# Altium PCB PCB1.PcbDoc
Units mil, origin at the board's own origin, x right, y up, seen from the top; angles counter-clockwise.
Board outline 4835 x 4005 mil, 2 copper layers (Top Layer, Bottom Layer); 7 components, 12 nets, 73 pads, 2 vias.
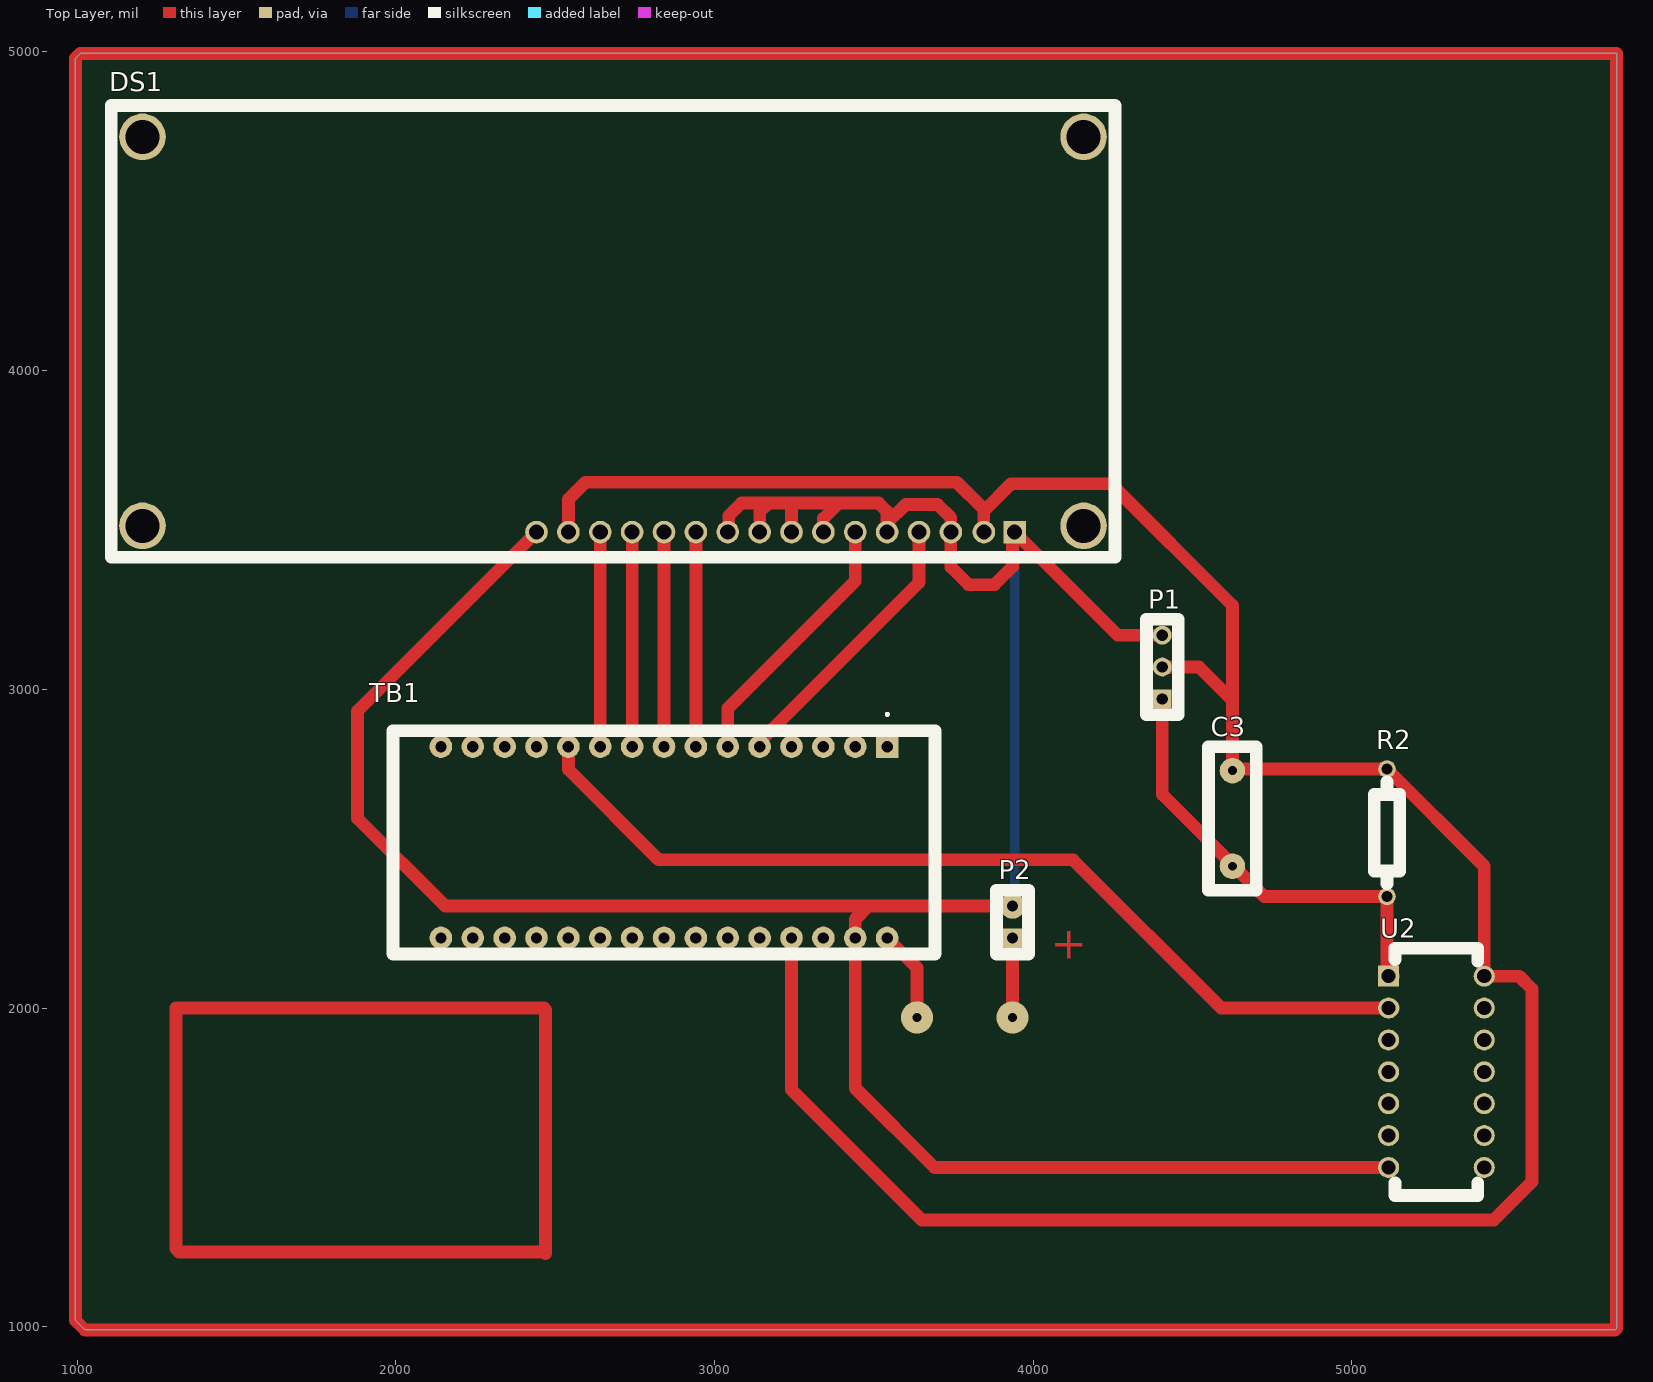
[diagram p0: Top Layer view]
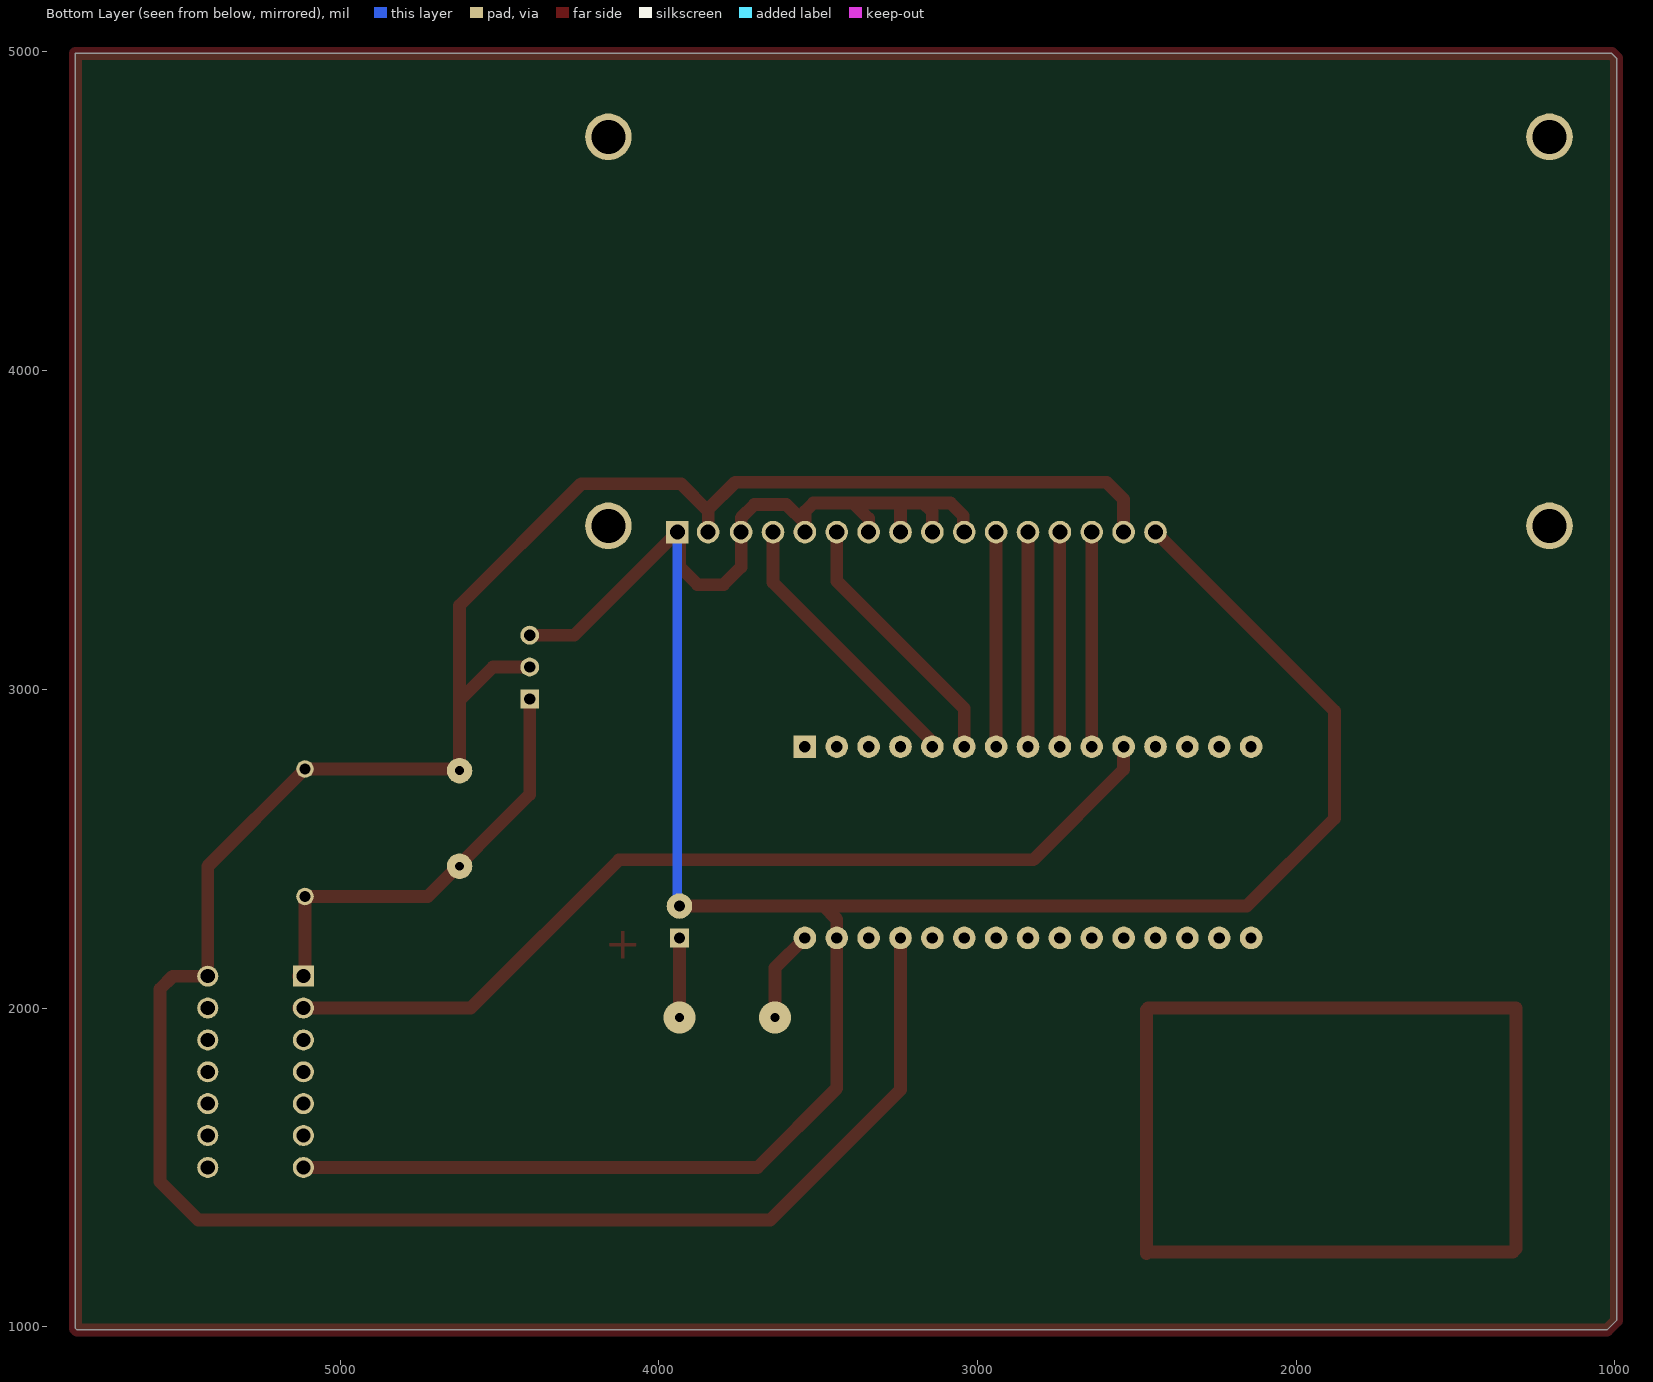
[diagram p1: Bottom Layer view, seen from below]

## Layer stack, top to bottom
Top Solder: solder mask 0.4, Solder Resist, Dk 3.5
Top Layer: signal copper 1.4
Dielectric 1: dielectric 12.6, FR-4, Dk 4.8
Bottom Layer: signal copper 1.4
Bottom Solder: solder mask 0.4, Solder Resist, Dk 3.5

## Board outline
995,1020 1025,990 5825,990 5830,995 5830,4995 1010,4995 995,4980

## Design rules (kind name [scope] priority, off if disabled: settings)
Clearance [All] p1: gap=10 ignorepadtopadclearanceinfootprint=FALSE except(0: Arc-Hole Track-Hole SMDPad-Hole THPad-Hole Via-Hole Fill-Hole Poly-Hole Region-Hole Text-Hole; 20: Arc-Arc Arc-Track Arc-SMDPad Arc-THPad Arc-Via Arc-Fill Arc-Poly Arc-Region Arc-Text Track-Track Track-SMDPad Track-THPad Track-Via Track-Fill Track-Poly Track-Region Track-Text)
PolygonConnect [All] p1: connectstyle=Relief reliefconductorwidth=10 reliefentries=4 polygonreliefangle="90 Angle" airgapwidth=10
RoutingVias [All] p1: holewidth=28 width=50 viastyle="Through Hole" minholewidth=28 minwidth=50 maxholewidth=28 maxwidth=50
SolderMaskExpansion [All] p1: expansion=4
Width [All] p1: maxlimit=40 minlimit=30 preferedwidth=40 toplayer_minwidth=40 bottomlayer_maxwidth=30 bottomlayer_prefwidth=30 minimp=50.000000 maximp=50.000000 favimp=50.000000
30 further rules are at their usual default settings.

## Components (designator, comment, footprint, x,y, rotation, side; value= is the part's Value field where it differs from the comment)
C3 "Cap" RAD-0.3 4625,2595 r90 top value=100pF
DS1 "LCM-S01602DTR/A" LCD_LCM-S01602DTR/A 2660,4135 r180 top
P1 "Header 3" HDR1X3 4405,2970 r90 top
P2 "Header 2" HDR1X2 3935,2220 r90 top
R2 "Res2" AXIAL-0.4 5110,2550 r90 top value=1K
TB1 "ARDUINO_NANO" *SHIELD_ARDUINO_NANO 2841.5,2520 r270 top
U2 "SN74AHC14N" DIP254P762X508-14 5415,1500 r0 top

## Footprints (in the part's own frame and the unit in brackets; to place one, negate y for a bottom-side part, rotate by r counter-clockwise, add the part's x,y. Pads: shape width x height; smd on the part's side, far side on the other; paste and mask are expansions set on the pad)
*SHIELD_ARDUINO_NANO [mm]
  rect 1.8x1.8 hole 0.9: 1(-7.62,17.78)
  round 1.8 hole 0.9: 2(-7.62,15.24) 3(-7.62,12.7) 4(-7.62,10.16) 5(-7.62,7.62) 6(-7.62,5.08) 7(-7.62,2.54) 8(-7.62,0) 9(-7.62,-2.54) 10(-7.62,-5.08) 11(-7.62,-7.62) 12(-7.62,-10.16) 13(-7.62,-12.7) 14(-7.62,-15.24) 15(-7.62,-17.78) 16(7.62,-17.78) 17(7.62,-15.24) 18(7.62,-12.7) 19(7.62,-10.16) 20(7.62,-7.62) 21(7.62,-5.08) 22(7.62,-2.54) 23(7.62,0) 24(7.62,2.54) 25(7.62,5.08) 26(7.62,7.62) 27(7.62,10.16) 28(7.62,12.7) 29(7.62,15.24) 30(7.62,17.78)
  silkscreen extent -10.3,-21.59 8.89,21.59
AXIAL-0.4 [mm] "Axial Device, Thru-Hole; 2 Leads; 0.4 in Pin Spacing"
  round 1.4 hole 0.85: 1(-5.08,0) 2(5.08,0)
  silkscreen extent -4.06,-1.02 4.06,1.02
DIP254P762X508-14 [mil]
  rect 66x66 hole 44: 1(-300,600)
  round 66 hole 44: 2(-300,500) 3(-300,400) 4(-300,300) 5(-300,200) 6(-300,100) 7(-300,0) 8(0,0) 9(0,100) 10(0,200) 11(0,300) 12(0,400) 13(0,500) 14(0,600)
  silkscreen extent -280,-88 -20,688
HDR1X2 [mm] "Connector; Header; 2 Position"
  rect 1.5x1.5 hole 0.9: 1(0,0)
  round 2.032 hole 0.9: 2(2.54,0)
  silkscreen extent -1.27,-1.27 3.81,1.27
HDR1X3 [mm] "Connector; Header; 3 Position"
  rect 1.5x1.5 hole 0.9: 1(0,0)
  round 1.5 hole 0.9: 2(2.54,0) 3(5.08,0)
  silkscreen extent -1.27,-1.27 6.35,1.27
LCD_LCM-S01602DTR/A [mm]
  rect 1.8x1.8 hole 1.2: 1(-32.55,16.3)
  round 1.8 hole 1.2: 2(-30.1,16.3) 3(-27.47,16.3) 4(-24.93,16.3) 5(-22.39,16.3) 6(-19.85,16.3) 7(-17.31,16.3) 8(-14.77,16.3) 9(-12.23,16.3) 10(-9.69,16.3) 11(-7.15,16.3) 12(-4.61,16.3) 13(-2.07,16.3) 14(0.47,16.3) 15(3.01,16.3) 16(5.55,16.3)
  round 3.716 hole 2.7: 17(-38.05,15.8) 18(-38.05,-15.2) 19(36.95,15.8) 20(36.95,-15.2)
  silkscreen extent -40.55,-17.7 39.45,18.3
RAD-0.3 [mil] "Radial Cap, Thru-Hole; 2 Leads; 0.3 in Pin Spacing"
  round 80 hole 27.56: 1(-150,0) 2(150,0)
  silkscreen extent -225,-75 225,75

## Part data
C3: "Capacitor", LatestRevisionDate=17-Jul-2002, LatestRevisionNote="Re-released for DXP Platform.", PackageDescription="Radial Cap, Thru-Hole; 2 Leads; 0.3 in Pin Spacing", PackageReference=RAD-0.3, Published=8-Jun-2000, Publisher="Altium Limited"
DS1: "Module, LCD; 16 x 2 mm; 5 x 8; 5 V _Typ._; 2 mA _Typ._; 4.2 V @50 degC _Min._", Package=None, Availability=Warning, MF=Lumex, MP=LCM-S01602DTR/A, Price="8.26 USD", SnapEDA_Link=https://www.snapeda.com/parts/LCM-S01602DTR/A/Lumex%2520Opto/Components%2520Inc/view-part/?ref=snap
P1: "Header, 3-Pin", LatestRevisionDate=17-Jul-2002, LatestRevisionNote="Re-released for DXP Platform.", Publisher="Altium Limited"
P2: "Header, 2-Pin", LatestRevisionDate=17-Jul-2002, LatestRevisionNote="Re-released for DXP Platform.", Publisher="Altium Limited"
R2: "Resistor", LatestRevisionDate=17-Jul-2002, LatestRevisionNote="Re-released for DXP Platform.", PackageDescription="Axial Device, Thru-Hole; 2 Leads; 0.4 in Pin Spacing", PackageReference=AXIAL-0.4, Published=8-Jun-2000, Publisher="Altium Limited"
TB1: "Dev.kit: Arduino; UART; ICSP, USB B mini, pin strips", Package=None, Availability=Unavailable, MF=Arduino, MP="ARDUINO NANO", Price=None, SnapEDA_Link=https://www.snapeda.com/parts/ARDUINO%20NANO/Arduino/view-part/?ref=snap
U2: "Inverter Schmitt Trigger 6-Element CMOS 14-Pin PDIP Tube", Package="DIP-14 Texas Instruments", Availability=Unavailable, MF="Texas Instruments", MP=SN74AHC14N, Price=None, SnapEDA_Link=https://www.snapeda.com/parts/SN74AHC14N/Texas%20Instruments/view-part/?ref=snap

## Via types
v1: diameter 100, hole 28, Top Layer to Bottom Layer, 2 vias

## Nets (pads, with @x,y where several pads share a name; then routed paths per layer and width w, separated by ;. In a path a pad name is that pad's centre, name@x,y a point inside that pad or via, vN(x,y) a via of type N, cw(c..) or ccw(c..) an arc to the next point about the centre after c; other vN are vias at no path point)
GND: DS1.1 DS1.3 DS1.5 DS1.7 DS1.8 DS1.9 DS1.10 DS1.16 P1.3 P2.2 TB1.29 U2.7 | length 9177.1
  Top Layer w40: DS1.16 1880,2931.77 1880,2595 2155,2320 3482.75,2320 ; DS1.10 3045,3496.77 3045,3545 3085,3585 3170,3585 ; DS1.9 3141.5,3556.5 3170,3585 ; DS1.8 3241.5,3571.5 3255,3585 ; DS1.7 3341.5,3536.5 3390,3585 ; P2.2 3482.75,2320 ; P1.3 4264.76,3170 DS1.1 3935,3486.77 3935,3385 3878.5,3328.5 3796.5,3328.5 3741.5,3383.5 DS1.3 3741.5,3538.5 3700,3580 3600,3580 DS1.5@3541.5,3521.5 ; U2.7 3690,1500 3441.5,1748.5 TB1.29 3441.5,2278.74 3482.75,2320 ; 3170,3585 3255,3585 ; 3255,3585 3390,3585 ; 3390,3585 3515,3585 3541.5,3558.5 DS1.5@3541.5,3521.5 ; DS1.5@3541.5,3508.5 3556.73,3493.27 DS1.5 DS1.5@3541.5,3508.5 ; DS1.5@3541.5,3508.5 DS1.5@3541.5,3521.5
  Bottom Layer w30: P2.2 3941.5,2326.5 DS1.1
NetC3_1: C3.1 P1.1 R2.1 U2.1 | length 1395.8
  Top Layer w40: P1.1 4405,2670 4725,2350 R2.1 5110,2120 U2.1@5130,2100
"NetDIP one way_1": P2.1 | length 250
  Top Layer w40: v1(3935,1970) P2.1
"NetDIP one way_12": TB1.30 | length 288.7
  Top Layer w40: TB1.30 3635,2126.5 v1(3635,1970)
NetDS1_4: DS1.4 TB1.5 | length 880.4
  Top Layer w40: TB1.5 3141.5,2835 3641.5,3335 DS1.4
NetDS1_6: DS1.6 TB1.6 | length 839
  Top Layer w40: TB1.6 3041.5,2940 3441.5,3340 DS1.6
NetDS1_11: DS1.11 TB1.7 | length 673.3
  Top Layer w40: TB1.7 DS1.11
NetDS1_12: DS1.12 TB1.8 | length 673.3
  Top Layer w40: TB1.8 DS1.12
NetDS1_13: DS1.13 TB1.9 | length 673.3
  Top Layer w40: TB1.9 DS1.13
NetDS1_14: DS1.14 TB1.10 | length 673.3
  Top Layer w40: TB1.10 DS1.14
NetTB1_11: TB1.11 U2.2 | length 2970
  Top Layer w40: TB1.11 2541.5,2748.5 2825,2465 4125,2465 4590,2000 U2.2 U2.2@5130,2000
VCC: C3.2 DS1.2 DS1.15 P1.2 R2.2 TB1.27 U2.14 | length 8328.8
  Top Layer w40: DS1.15 2541.5,3596.5 2595,3650 3760,3650 3845.04,3564.96 3845.04,3560 ; TB1.27 3241.5,1743.5 3650,1335 5445,1335 5565,1455 5565,2060 5525,2100 U2.14@5430,2100 ; DS1.2 3845.04,3560 ; P1.2 4520,3070 4625,2965 ; C3.2 4625,2965 ; C3.2@4645,2750 R2.2 5415,2445 5415,2115 U2.14@5430,2100 ; U2.14 U2.14@5430,2100 ; 3845.04,3560 3930.04,3645 4243,3645 4625,3263 4625,2965
pads on no net: DS1.17 DS1.18 DS1.19 DS1.20 TB1.1 TB1.2 TB1.3 TB1.4 TB1.12 TB1.13 TB1.14 TB1.15 TB1.16 TB1.17 TB1.18 TB1.19 TB1.20 TB1.21 TB1.22 TB1.23 TB1.24 TB1.25 TB1.26 TB1.28 U2.3 U2.4 U2.5 U2.6 U2.8 U2.9 U2.10 U2.11 U2.12 U2.13
copper on no net: | length 21499
  Top Layer w40: 995,1020 995,4980 1010,4995 5830,4995 5830,995 5825,990 1025,990 995,1020 ; 1310,1245 1310,2000 2465,2000 2470,1995 2470,1230 2465,1235 1320,1235 1310,1245

## Other copper
Top Layer:
  text "+" at 4055,2155 h100